# Altium PCB PCB1.PcbDoc (part 1 of 3)
Units mil, origin at the board's own origin, x right, y up, seen from the top; angles counter-clockwise.
Board outline 3937.01 x 3937.01 mil, 2 copper layers (Top Layer, Bottom Layer); 162 components, 129 nets, 526 pads, 166 vias.
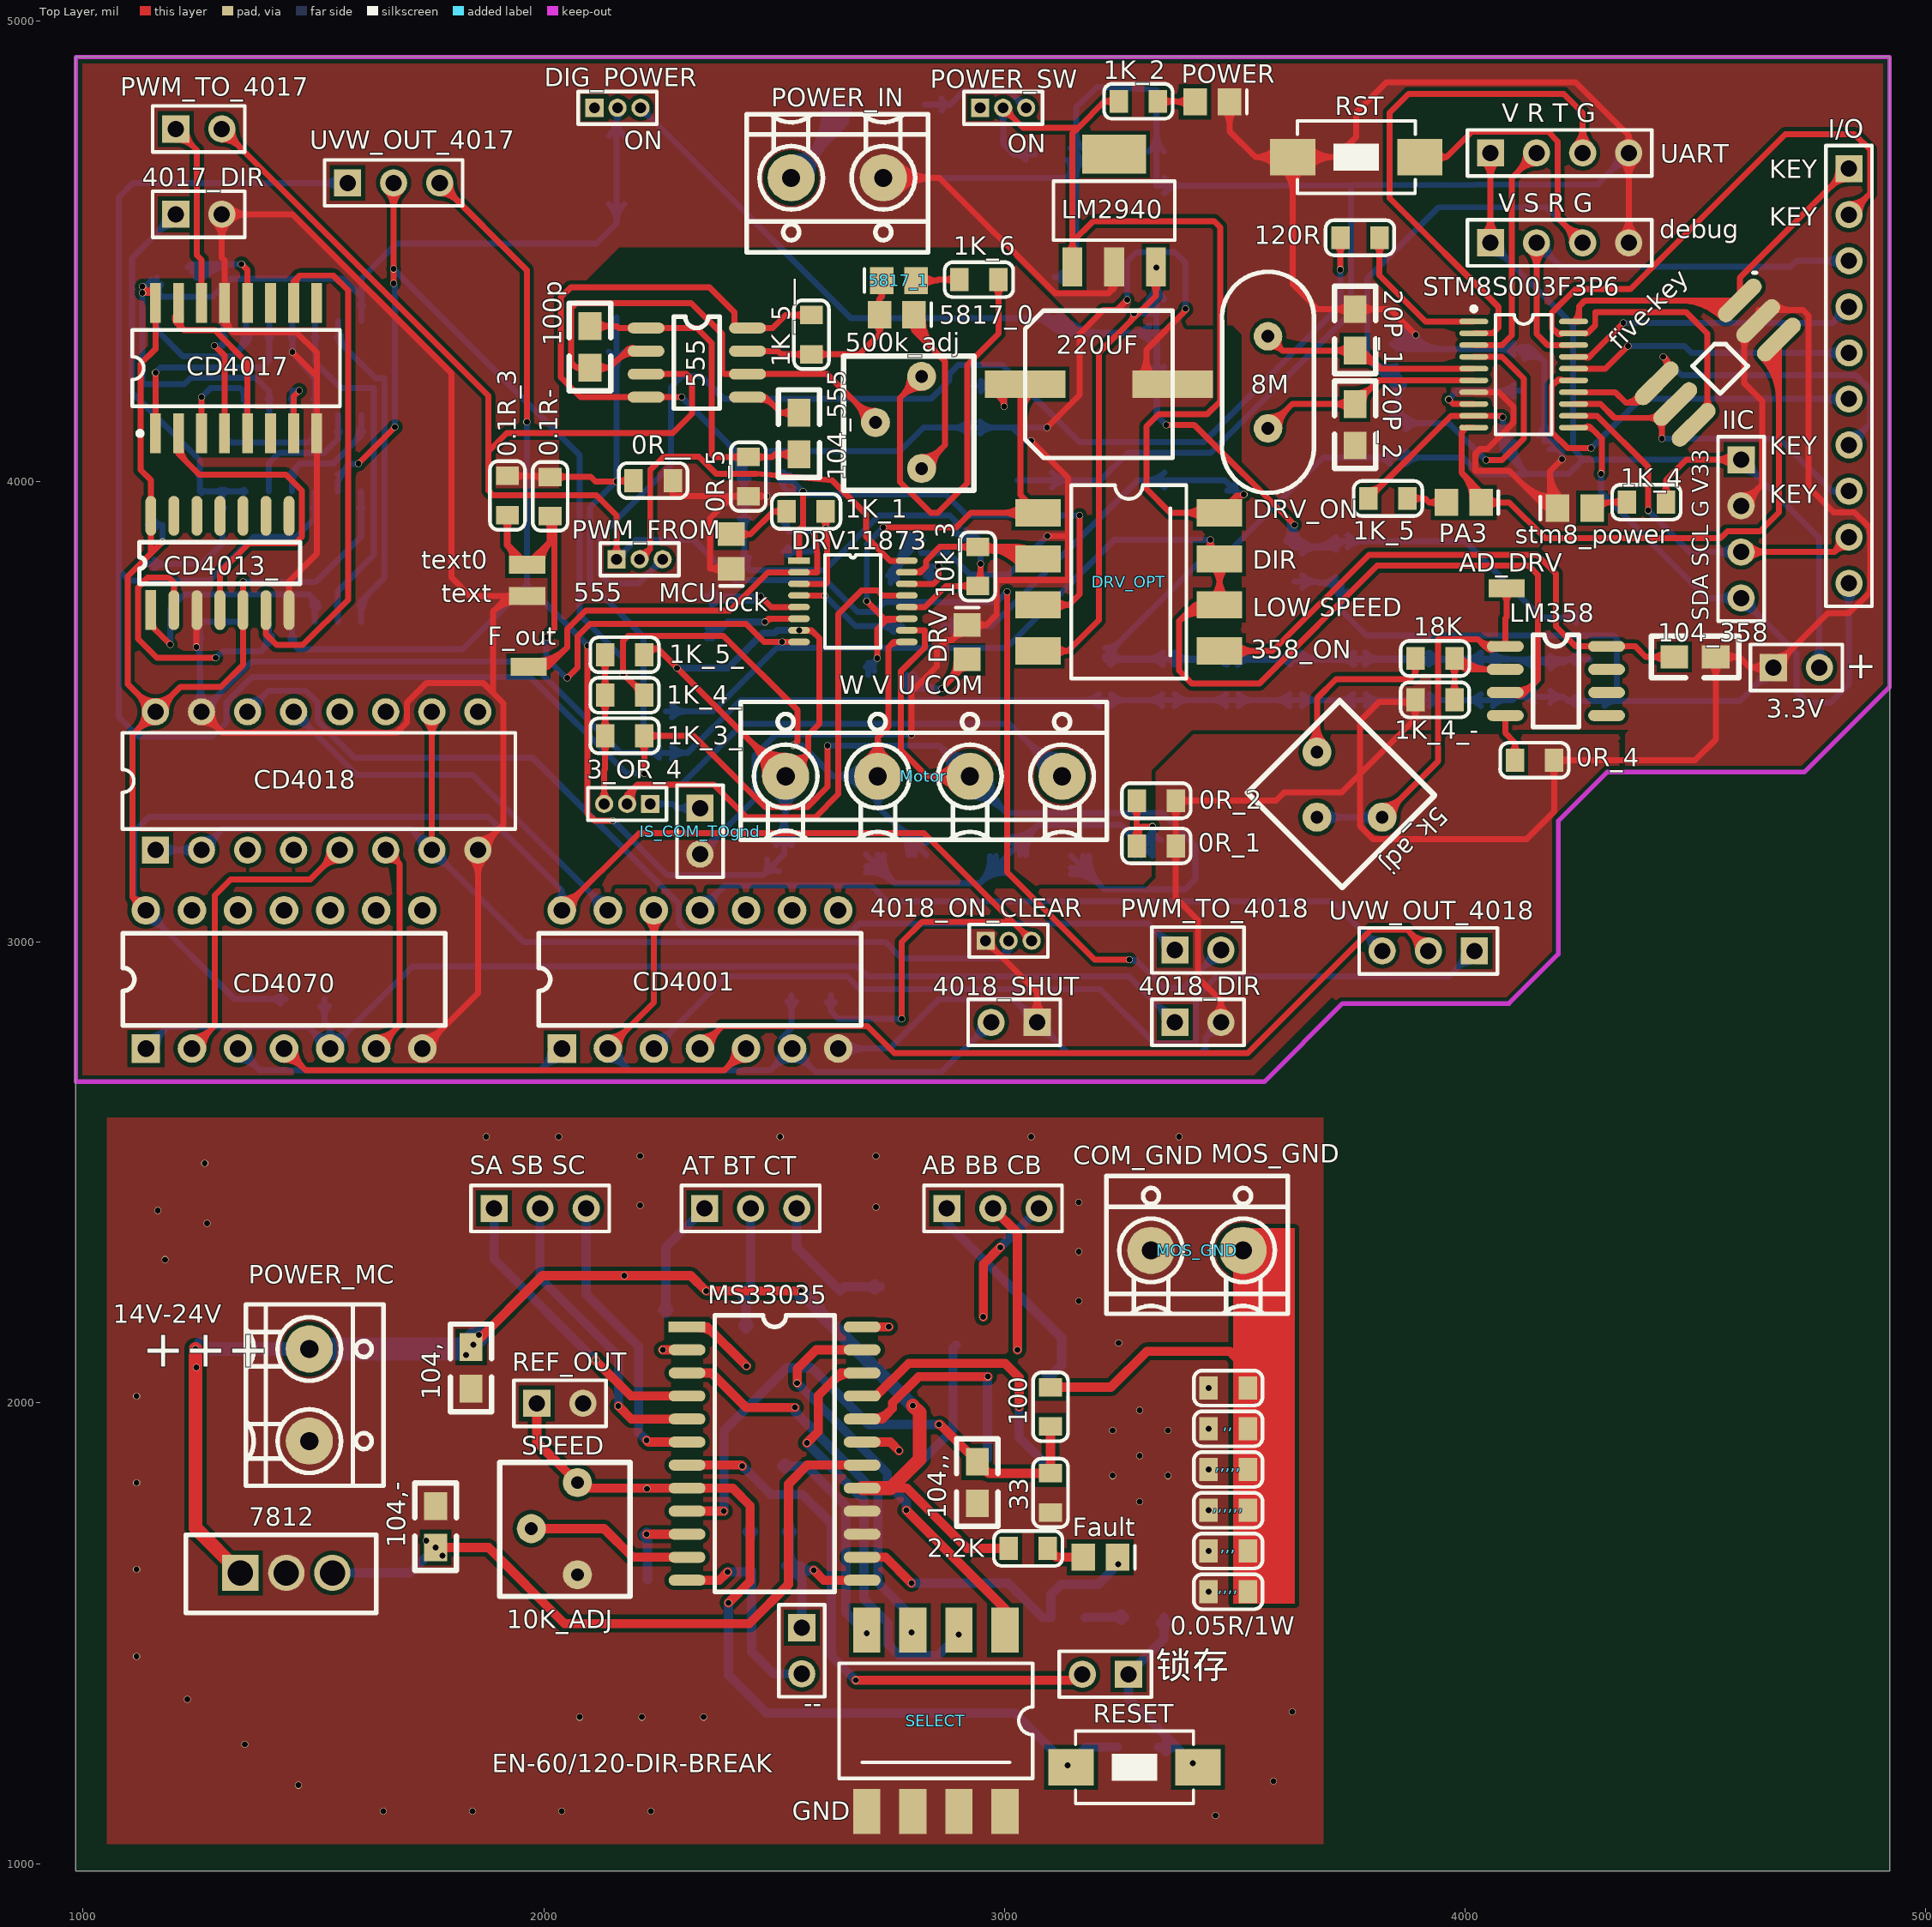
[diagram p0: Top Layer view]
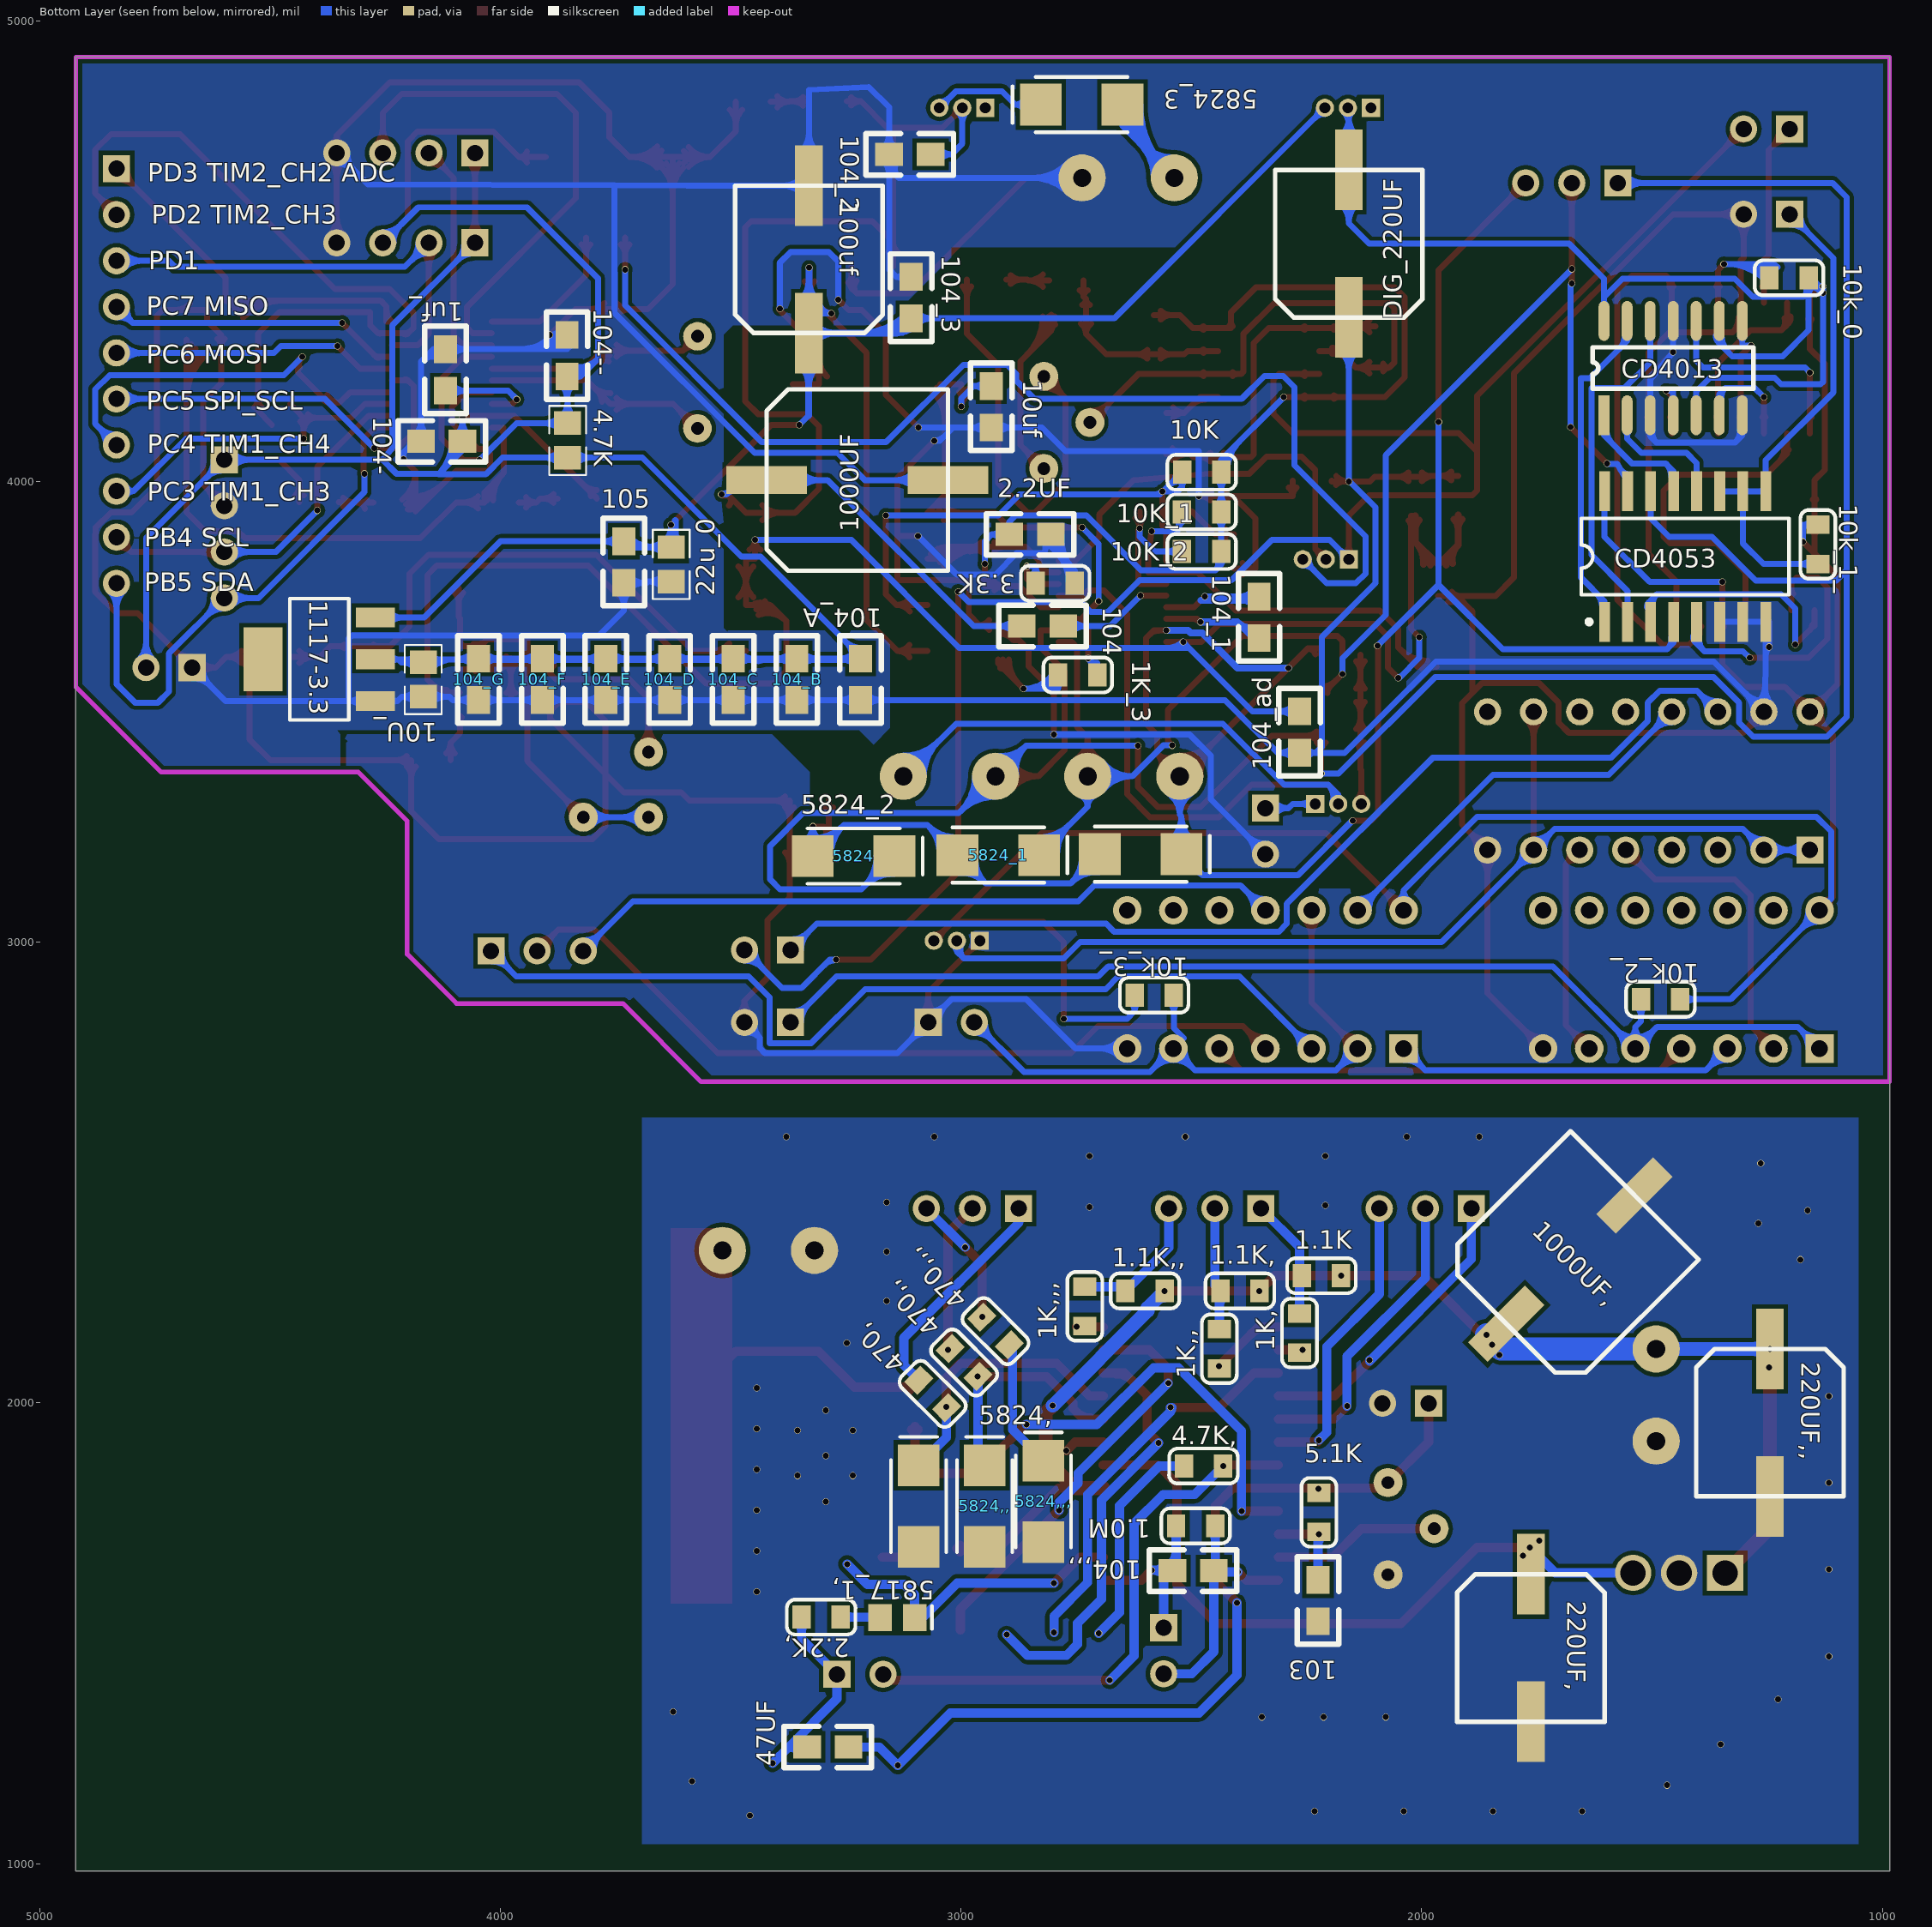
[diagram p1: Bottom Layer view, seen from below]
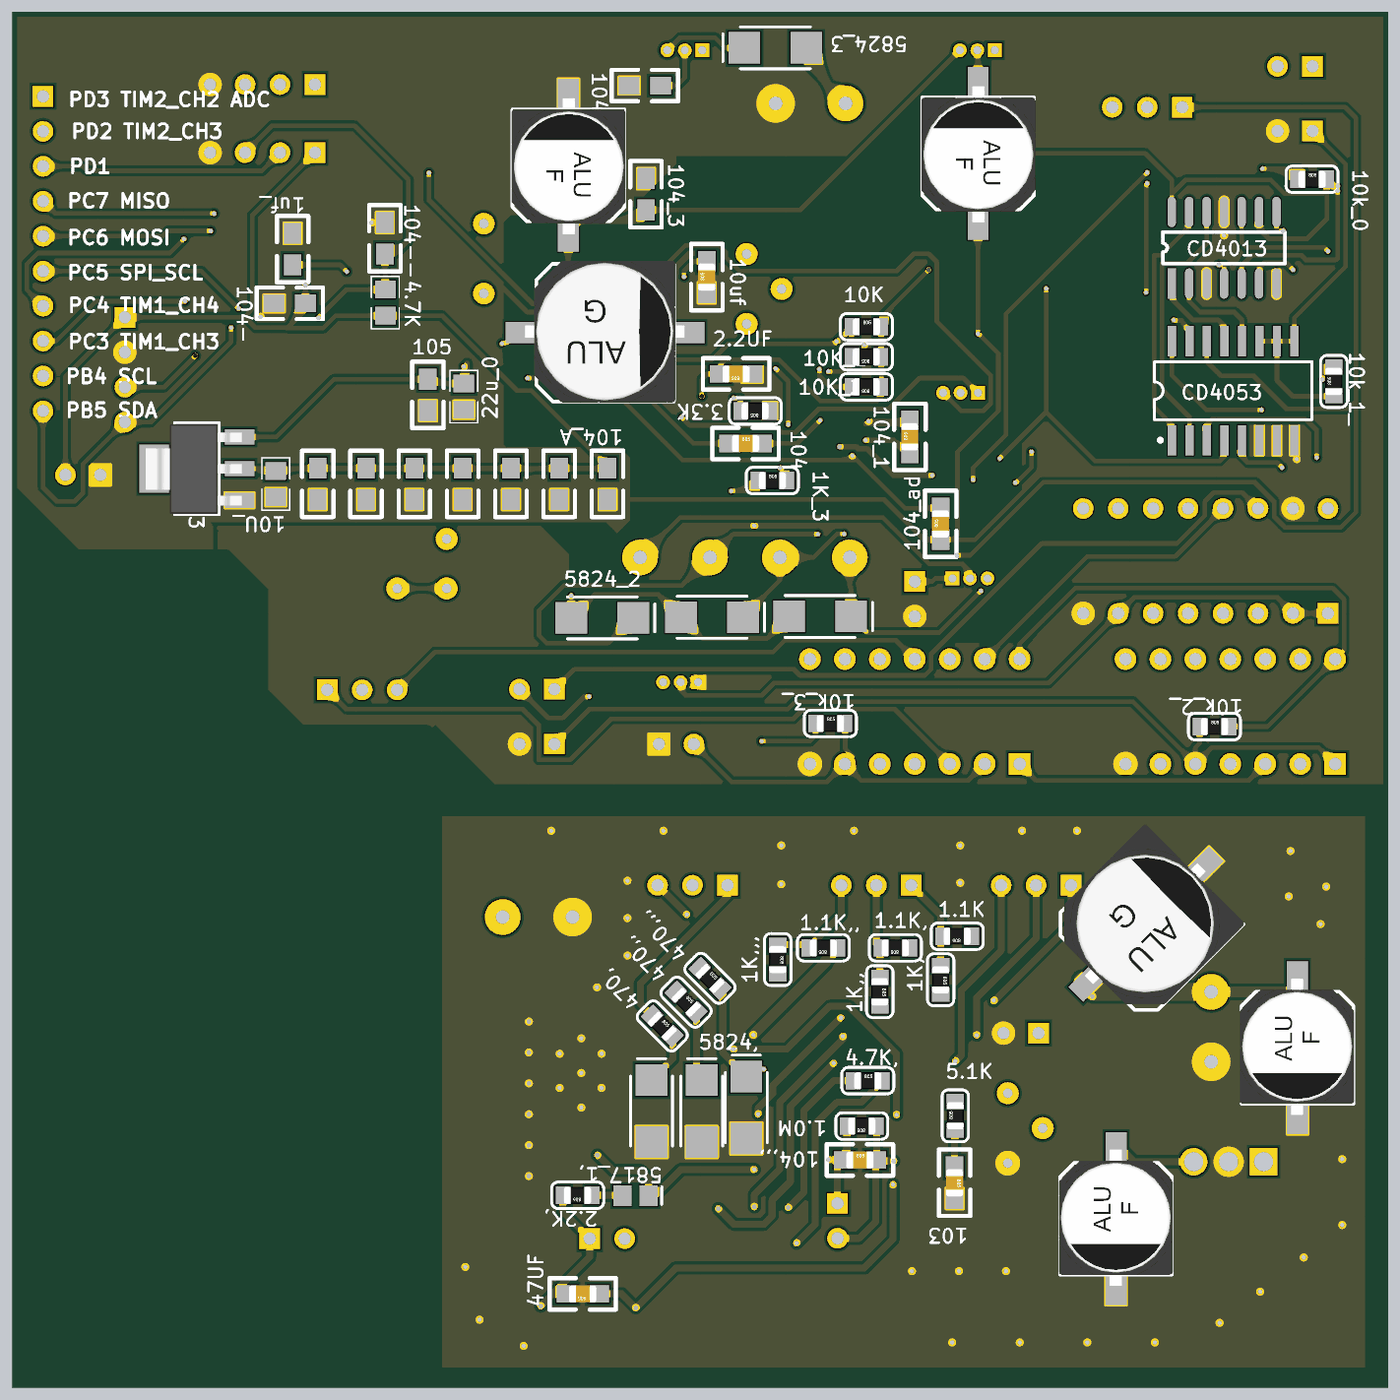
[diagram p4: 3D render of the assembled board from below, using the file's embedded part models]

## Layer stack, top to bottom
Top Layer: signal copper 1.4
Dielectric: dielectric 12.6, FR-4, Dk 4.8
Bottom Layer: signal copper 1.4

## Board outline
984.25,984.25 4921.26,984.25 4921.26,4921.26 984.25,4921.26

## Design rules (kind name [scope] priority, off if disabled: settings)
Clearance [All] p1: gap=9
ComponentClearance [All] p1 off: gap=10 collisioncheckmode=3 verticalgap=10 showdistances=FALSE
PlaneConnect [All] p1: planeconnectstyle=Direct reliefexpansion=20 reliefentries=4 reliefconductorwidth=10 reliefairgap=10
PolygonConnect [All] p1: connectstyle=Direct reliefconductorwidth=10 reliefentries=4 polygonreliefangle="90 Angle"
RoutingVias [All] p1: holewidth=13 width=15 viastyle="Through Hole" minholewidth=13 minwidth=15 maxholewidth=13 maxwidth=15
SilkscreenOverComponentPads [All] p1: minsilkscreentomaskgap=10
SolderMaskExpansion [All] p1: expansion=4
Width Width_1 [All] p1: maxlimit=50 minlimit=8 preferedwidth=13
25 further rules are at their usual default settings.

## Classes and differential pairs
component class Sheet1: 0.1R- 0.1R_3 0R_1 0R_2 0R_4 0R_5 0R__ 1K_1 1K_2 1K_3 1K_3_ 1K_4 1K_4_ 1K_4_- 1K_5 1K_5_ 1K_5__ 1K_6 1uf_ 2.2UF 3.3K 3.3V 3_OR_4 4.7K 5k_adj 8M 10K 10k_0 10K_1 10k_1_ 10K_2 10k_2_ 10k_3 10k_3_ 10U_ 10uf 18K 20P_1 20P_2 22u_0 30pf 100p 100uf 104 104- 104-- 104_1 104_2 104_3 104_358 104_555 104_A 104_ad 104_B 104_C 104_D 104_E 104_F 104_G 105 120R 220UF 500k_adj 555 1000UF 1117-3.3 4017_DIR 4018_DIR 4018_ON_CLEAR 4018_SHUT 5817_0 5817_1 5824 5824_1 5824_2 5824_3 AD_DRV CD4001 CD4013 CD4013_ CD4017 CD4018 CD4053 CD4070 change debug DIG_220UF DIG_POWER DRV DRV11873 DRV_OPT F_out five-key I/O IIC IS_COM_TOgnd LM358 LM2940 lock Motor PA3 POWER POWER_IN POWER_SW PWM_FROM PWM_TO_4017 PWM_TO_4018 RST stm8_power STM8S003F3P6 text text0 UART UVW_OUT_4017 UVW_OUT_4018

## Components (designator, comment, footprint, x,y, rotation, side; value= is the part's Value field where it differs from the comment)
0.1R- "Res2" "RES 0805_1" 2014,4010 r270 top
0.1R_3 "Res2" "RES 0805_1" 1921,4012 r270 top
0.05R/1W "Res2" "RES 0805_1" 3528,2032 r180 top
0R_1 "Res2" "RES 0805_1" 3372,3209 r180 top
0R_2 "Res2" "RES 0805_1" 3372,3307 r180 top
0R_4 "Res2" "RES 0805_1" 4108,3395 r0 top
0R_5 "Res2" "RES 0805_1" 2444,4053 r270 top
0R__ "Res2" "RES 0805_1" 2195,4002 r0 top
1.0M "Res2" "RES 0805_1" 2448,1733 r0 bottom
1.1K "Res2" "RES 0805_1" 2175,2276 r0 bottom
1.1K, "Res2" "RES 0805_1" 2352,2243 r0 bottom
1.1K,, "Res2" "RES 0805_1" 2558,2243 r0 bottom
1K, "Res2" "RES 0805_1" 2265,2194 r270 bottom
1K,, "Res2" "RES 0805_1" 2439,2160 r270 bottom
1K,,, "Res2" "RES 0805_1" 2731,2252 r270 bottom
1K_1 "Res2" "RES 0805_1" 2527,3935 r0 top
1K_2 "Res2" "RES 0805_1" 3333,4825 r180 top
1K_3 "Res2" "RES 0805_1" 2789,3580 r180 bottom
1K_3_ "Res2" "RES 0805_1" 2133,3448 r0 top
1K_4 "Res2" "RES 0805_1" 4351,3955 r0 top
1K_4_ "Res2" "RES 0805_1" 2133,3536 r0 top
1K_4_- "Res2" "RES 0805_1" 3976.9,3526 r180 top
1K_5 "Res2" "RES 0805_1" 3875,3963 r180 top
1K_5_ "Res2" "RES 0805_1" 2133,3624 r0 top
1K_5__ "Res2" "RES 0805_1" 2581,4276 r90 top
1K_6 "Res2" "RES 0805_1" 2902,4438 r0 top
1uf_ "1UF" 0805 4119,4197 r90 bottom
2.2K "Res2" "RES 0805_1" 3009,1684 r0 top
2.2K, "Res2" "RES 0805_1" 3261,1535 r0 bottom
2.2UF "Cap" 0805_C 2805,3885 r0 bottom
3.3K "Res2" "RES 0805_1" 2753,3779 r0 bottom
3.3V "PIN 2" HDR1X2 4669,3596 r0 top
3_OR_4 "MHDR1X3" MHDR1X3 2231,3300 r180 top
4.7K "4.7K" 0805-1 3854,4089 r270 bottom
4.7K, "Res2" "RES 0805_1" 2516,1863 r180 bottom
5.1K "Res2" "RES 0805_1" 2223,1720 r90 bottom
5k_adj "Header 3" pot（正方形） 3761,3436 r225 top
8M "8M" XTAL2 3572,4115 r270 top
10K "Res2" "RES 0805_1" 2519.9,4020 r180 bottom
10k_0 "Res2" "RES 0805_1" 1245,4442 r180 bottom
10K_1 "Res2" "RES 0805_1" 2435,3934 r0 bottom
10k_1_ "Res2" "RES 0805_1" 1140,3821 r90 bottom
10K_2 "Res2" "RES 0805_1" 2435,3848 r0 bottom
10k_2_ "Res2" "RES 0805_1" 1524,2876 r180 bottom
10k_3 "Res2" "RES 0805_1" 2942,3858 r270 top
10k_3_ "Res2" "RES 0805_1" 2623,2885 r180 bottom
10U_ "Cap Pol1" 0805-1 4167,3570 r270 bottom
10uf "Cap" 0805_C 2934,4117 r90 bottom
18K "Res2" "RES 0805_1" 3892,3616 r0 top
20P_1 "20P" 0805 3761,4374 r270 top
20P_2 "20P" 0805 3761,4078 r90 top
22u_0 "Cap Pol1" 0805-1 3629,3820 r270 bottom
33 "Res2" "RES 0805_1" 3100,1762.11 r90 top
47UF "Cap" 0805_C 3244,1253 r0 bottom
100 "Res2" "RES 0805_1" 3100,2034 r270 top
100p "Cap" 0805_C 2100,4337 r270 top
100uf "Cap Pol1" capso_8*10 3330,4482 r270 bottom
103 "Cap" 0805_C 2225,1616 r270 bottom
104 "Cap" 0805_C 2868,3686 r180 bottom
104, "Cap" 0805_C 1842,2031 r90 top
104,, "Cap" 0805_C 2941,1872 r270 top
104,,, "Cap" 0805_C 2541,1636 r180 bottom
104,- "Cap" 0805_C 1765,1776 r270 top
104- "104" 0805 4082,4087 r0 bottom
104-- "104" 0805 3855,4318 r270 bottom
104_1 "Cap" 0805_C 2353,3660 r90 bottom
104_2 "Cap" 0805 3156,4710 r180 bottom
104_3 "Cap" 0805 3108,4444 r270 bottom
104_358 "Cap" 0805_C 4544,3619 r180 top
104_555 "Cap" 0805_C 2554,4059 r90 top
104_A "104" 0805 3218,3615.53 r270 bottom
104_ad "Cap" 0805_C 2265,3411 r90 bottom
104_B "104" 0805 3356.17,3615.53 r270 bottom
104_C "104" 0805 3494.33,3615.53 r270 bottom
104_D "104" 0805 3632.5,3615.53 r270 bottom
104_E "104" 0805 3770.67,3615.53 r270 bottom
104_F "104" 0805 3908.83,3615.53 r270 bottom
104_G "104" 0805 4047,3615.53 r270 bottom
105 "105" 0805 3732,3870 r270 bottom
120R "Res2" "RES 0805_1" 3814,4529 r180 top
220UF "Cap Pol1" capso_8*10 3205,4211 r180 top
220UF, "Cap Pol1" capso_8*10 1763,1468 r90 bottom
220UF,, "Cap Pol1" capso_8*10 1244,1957 r90 bottom
470, "Res2" "RES 0805_1" 3091.41,2049.48 r225 bottom
470,, "Res2" "RES 0805_1" 3023.17,2117.71 r225 bottom
470,,, "Res2" "RES 0805_1" 2954.93,2185.95 r225 bottom
500k_adj "Header 3" pot（正方形） 2895,4186 r180 top
555 "Header 4X2A" SOP8 2337,4258 r0 top
1000UF "Cap Pol1" CAPSO_10*10 3225,4003 r0 bottom
1000UF, "Cap Pol1" CAPSO_10*10 1677,2311 r315 bottom
1117-3.3 "LM1117" SOT223 4390,3634 r90 bottom
4017_DIR "Header 2" HDR1X2 1201,4580 r0 top
4018_DIR "Header 2" HDR1X2 3370,2826 r0 top
4018_ON_CLEAR "MHDR1X3" MHDR1X3 2959,3003 r0 top
4018_SHUT "Header 2" HDR1X2 3071,2826 r180 top
5817_0 "1N5819" LED_0805 2766,4362 r0 top
5817_1 "1N5819" LED_0805 2771,4436 r180 top
5817_1, "1N5819" LED_0805 3138,1534 r180 bottom
5824 "1N5819" DIODE-SMA 3233,3187 r180 bottom
5824, "1N5819" DIODE-SMA 3092,1776 r90 bottom
5824,, "1N5819" DIODE-SMA 2948.5,1776 r90 bottom
5824,,, "1N5819" DIODE-SMA 2821,1786 r90 bottom
5824_1 "1N5819" DIODE-SMA 2919,3189 r180 bottom
5824_2 "1N5819" DIODE-SMA 2610,3191 r180 bottom
5824_3 "1N5819" DIODE-SMA 2738,4818 r0 bottom
7812 "L78XXCV" TO-220B 1341,1631 r0 top
,, "Res2" "RES 0805_1" 3528,1943.6 r180 top
,,, "Res2" "RES 0805_1" 3528,1678.4 r180 top
,,,, "Res2" "RES 0805_1" 3528,1590 r180 top
,,,,, "Res2" "RES 0805_1" 3528,1855.2 r180 top
,,,,,, "Res2" "RES 0805_1" 3528,1766.8 r180 top
-- "Header 2" HDR1X2 2560,1512 r270 top
"AB BB CB" "Header 3" HDR1X3 2875,2422 r0 top
AD_DRV "1PIN" P 4090,3768 r180 top
"AT BT CT" "Header 3" HDR1X3 2349,2422 r0 top
CD4001 "Header 7X2A" DIP14 2039,2769 r90 top
CD4013 "Header 7X2A" SOP-14P 1454,4246 r90 bottom
CD4013_ "Header 7X2A" SOP-14P 1297,3823 r90 top
CD4017 "Header 8X2A" sop16(2003) 1332,4246 r0 top
CD4018 "Header 8X2A" DIP16 1507,3350 r0 top
CD4053 "Header 8X2A" sop16(2003) 1428,3837 r180 bottom
CD4070 "Header 7X2A" DIP14 1136.17,2769 r90 top
debug "Header 4" HDR1X4 4055,4518 r0 top
DIG_220UF "Cap Pol1" capso_8*10 2158,4516 r270 bottom
DIG_POWER "MHDR1X3" MHDR1X3 2110,4811 r0 top
DRV "LED" LED_0805 2919,3651 r90 top
DRV11873 "Header 8X2A" TSSOP16 2554,3828 r0 top
DRV_OPT "SW DIP-4" SW8_4BIT 3270,3782 r270 top
F_out "1PIN" P 1967,3598 r180 top
Fault "LED" LED_0805 3208,1665 r0 top
five-key "five_key" 五向按键 4416,4213 r0 top
I/O "Header 10" HDR1X10 4833,4679 r270 top
IIC "Header 4" HDR1X4 4599,4047 r270 top
IS_COM_TOgnd "Header 2" HDR1X2 2339,3291 r270 top
LM358 "10358" SOP8 4202,3567 r0 top
LM2940 "LM2940_2" SOT223 3258,4585 r0 top
lock "LED" LED_0805 2407,3848 r270 top
MOS_GND "Header 2" ED120/2DS_1 3518,2331 r180 top
Motor "Header 4" ED120/4DS_1 3125,3360 r180 top
MS33035 "Header 12X2A" SO-24W 2312,2165 r0 top
PA3 "LED" LED_0805 3997,3954.53 r0 top
POWER "LED" LED_0805 3451,4824 r0 top
POWER_IN "Header 2" ED120/2DS_1 2537,4659 r0 top
POWER_MC "Header 2" ED120/2DS_1 1491,1917 r90 top
POWER_SW "MHDR1X3" MHDR1X3 2947,4811 r0 top
PWM_FROM "MHDR1X3" MHDR1X3 2158,3831 r0 top
PWM_TO_4017 "Header 2" HDR1X2 1201,4765 r0 top
PWM_TO_4018 "Header 2" HDR1X2 3370,2983 r0 top
REF_OUT "Header 2" HDR1X2 1985,1999 r0 top
RESET "SW-PB" SW_PB2_A1 3280,1209 r270 top
RST "SW-PB" SW_PB2_A1 3766,4704 r90 top
"SA SB SC" "Header 3" HDR1X3 1892,2422 r0 top
SELECT "SW DIP-4" SW8_4BIT 2851,1310 r180 top
SPEED "MHDR1X3" pot（正方形） 2148,1785 r180 top
stm8_power "LED" LED_0805 4238,3942 r180 top
STM8S003F3P6 "STM8S003F3P6" TSSOP20 4127,4232 r270 top
text "1PIN" P 1964,3751 r180 top
text0 "1PIN" P 1964,3819 r180 top
UART "PIN 4" HDR1X4 4055,4713 r0 top
UVW_OUT_4017 "Header 3" HDR1X3 1574,4648 r0 top
UVW_OUT_4018 "Header 3" HDR1X3 4020,2981 r180 top
锁存 "Header 2" HDR1X2 3269,1411 r180 top

## Footprints (in the part's own frame and the unit in brackets; to place one, negate y for a bottom-side part, rotate by r counter-clockwise, add the part's x,y. Pads: shape width x height; smd on the part's side, far side on the other; paste and mask are expansions set on the pad)
0805 [mil]
  rect 60x50 smd: 1(0,0) 2(90,0)
  silkscreen extent -50,-45 140,45
0805-1 [mm] "贴?"
  rect 1.3x1.5 smd: 1(-0.95,0) 2(0.95,0)
  silkscreen extent -1.91,-1.02 1.91,1.02, body extent -1.14,-0.51 1.14,0.51, height 1
0805_C [mil]
  rect 60x50 smd: 1(0,0) 2(90,0)
  silkscreen extent -50,-45 140,45, body extent 6,-25 84,25, height 31
capso_8*10 [mil]
  rect 175x60 smd: 1(160,0) 2(-160,0)
  silkscreen extent -160,-160 160,160, body extent -192,-162 198,164, height 402
CAPSO_10*10 [mil]
  rect 175x60 smd: 1(196.85,0) 2(-196.85,0)
  silkscreen extent -197,-197 197,197, body extent -227,-206 229,200, height 402
DIODE-SMA [mm] "贴?"
  rect 2.3x2.3 smd: 1(-2.25,0) 2(2.25,0)
  silkscreen extent -2.54,-1.52 3.81,1.52, body extent -2.92,-1.4 2.92,1.4, height 3
DIP14 [mil]
  rect 62x62 hole 36: 1(0,0)
  round 62 hole 36: 2(0,-100) 3(0,-200) 4(0,-300) 5(0,-400) 6(0,-500) 7(0,-600) 8(300,-600) 9(300,-500) 10(300,-400) 11(300,-300) 12(300,-200) 13(300,-100) 14(300,0)
  silkscreen extent 50,-650 250,50
DIP16 [mm]
  rect 1.5x1.5 hole 0.9: 1(-8.89,-3.81)
  round 1.5 hole 0.9: 2(-6.35,-3.81) 3(-3.81,-3.81) 4(-1.27,-3.81) 5(1.27,-3.81) 6(3.81,-3.81) 7(6.35,-3.81) 8(8.89,-3.81) 9(8.89,3.81) 10(6.35,3.81) 11(3.81,3.81) 12(1.27,3.81) 13(-1.27,3.81) 14(-3.81,3.81) 15(-6.35,3.81) 16(-8.89,3.81)
  silkscreen extent -10.72,-2.65 10.95,2.65
ED120/2DS_1 [mm]
  round 2.6 hole 1: 1(0,0) 2(5.08,0)
  silkscreen extent -2.46,-4.1 7.54,3.5
ED120/4DS_1 [mm]
  round 2.6 hole 1: 1(0,0) 2(5.08,0) 3(10.16,0) 4(15.24,0)
  silkscreen extent -2.46,-4.1 17.72,3.5
HDR1X2 [mm] "Connector; Header; 2 Position"
  rect 1.5x1.5 hole 0.9: 1(0,0)
  round 1.5 hole 0.9: 2(2.54,0)
  silkscreen extent -1.27,-1.27 3.81,1.27
HDR1X3 [mm] "Connector; Header; 3 Position"
  rect 1.5x1.5 hole 0.9: 1(0,0)
  round 1.5 hole 0.9: 2(2.54,0) 3(5.08,0)
  silkscreen extent -1.27,-1.27 6.35,1.27
HDR1X4 [mm] "Connector; Header; 4 Position"
  rect 1.5x1.5 hole 0.9: 1(0,0)
  round 1.5 hole 0.9: 2(2.54,0) 3(5.08,0) 4(7.62,0)
  silkscreen extent -1.27,-1.27 8.89,1.27
HDR1X10 [mm] "Connector; Header; 10 Position"
  rect 1.5x1.5 hole 0.9: 1(0,0)
  round 1.5 hole 0.9: 2(2.54,0) 3(5.08,0) 4(7.62,0) 5(10.16,0) 6(12.7,0) 7(15.24,0) 8(17.78,0) 9(20.32,0) 10(22.86,0)
  silkscreen extent -1.27,-1.27 24.13,1.27
LED_0805 [mm] "贴?"
  rect 1.3x1.5 smd: 1(-0.95,0) 2(0.95,0)
  silkscreen extent 1.91,-0.64 1.91,0.64
MHDR1X3 [mm] "Connector; Header; 3 Position"
  rect 1x1 hole 0.6: 1(0,0)
  round 1 hole 0.6: 2(1.27,0) 3(2.54,0)
  silkscreen extent -0.9,-0.9 3.44,0.9
P [mm]
  rect 2x1 smd: 1(0,0)
pot（正方形） [mm]
  round 1.6 hole 0.7: 1(1.905,-1.067) 2(4.445,1.473) 3(1.905,4.013)
  silkscreen extent -0.99,-2.18 6.2,5.21
"RES 0805_1" [mil]
  rect 40x50 smd: 1(0,0) 2(85,0)
  silkscreen extent -32,-38 117,38, body extent 3,-25 82,25, height 30
SO-24W [mil]
  rect 80x24 smd: 1(-1,0)
  oval 80x24 smd: 2(-1,-50) 3(-1,-100) 4(-1,-150) 5(-1,-200) 6(-1,-250) 7(-1,-300) 8(-1,-350) 9(-1,-400) 10(-1,-450) 11(-1,-500) 12(-1,-550) 13(379,-550) 14(379,-500) 15(379,-450) 16(379,-400) 17(379,-350) 18(379,-300) 19(379,-250) 20(379,-200) 21(379,-150) 22(379,-100) 23(379,-50) 24(379,0)
  silkscreen extent 59,-575 319,25
SOP8 [mil]
  oval 80x24 smd: 1(-115,75) 2(-115,25) 3(-115,-25) 4(-115,-75) 5(105,-75) 6(105,-25) 7(105,25) 8(105,75)
  silkscreen extent -55,-100 45,100, body extent -126,-95 110,97, height 67
sop16(2003) [mm] "Small Outline; 16 Leads; Body Width 5.6 mm; Pit"
  rect 0.6x2.2 smd: 1(-4.445,-3.6) 2(-3.175,-3.6) 3(-1.905,-3.6) 4(-0.635,-3.6) 5(0.635,-3.6) 6(1.905,-3.6) 7(3.175,-3.6) 8(4.445,-3.6) 9(4.445,3.6) 10(3.175,3.6) 11(1.905,3.6) 12(0.635,3.6) 13(-0.635,3.6) 14(-1.905,3.6) 15(-3.175,3.6) 16(-4.445,3.6)
  silkscreen extent -5.73,-3.72 5.73,2.1
SOP-14P [mm]
  rect 2.2x0.6 smd: 1(-2.6,3.81)
  oval 2.2x0.6 smd: 2(-2.6,2.54) 3(-2.6,1.27) 4(-2.6,0) 5(-2.6,-1.27) 6(-2.6,-2.54) 7(-2.6,-3.81) 8(2.6,-3.81) 9(2.6,-2.54) 10(2.6,-1.27) 11(2.6,0) 12(2.6,1.27) 13(2.6,2.54) 14(2.6,3.81)
  silkscreen extent -1.14,-4.42 1.14,4.44
SOT223 [mm]
  rect 1.1x2.15 smd: 1(-2.808,-3.025) 2(-0.508,-3.025) 3(1.792,-3.025)
  rect 3.5x2.15 smd: 4(-0.508,3.175)
  silkscreen extent -3.86,-1.55 2.84,1.7, body extent -3.78,-3.2 2.72,3.8, height 1.65
SW8_4BIT [mm]
  rect 1.5x2.5 smd: 1(-3.81,-5) 2(-1.27,-5) 3(1.27,-5) 4(3.81,-5) 5(3.81,5) 6(1.27,5) 7(-1.27,5) 8(-3.81,5)
  silkscreen extent -5.33,-3.18 5.33,3.18, body extent -5.21,-3.43 5.08,3.43, height 2.15
SW_PB2_A1 [mm]
  rect 2x2.5 smd: 1(0,3.556) 2(0,-3.444)
  silkscreen extent -2,-3.19 2,3.31, body extent -2.03,-3.17 2.03,3.3, height 1.2
TO-220B [mm]
  rect 2x2 hole 1.4: 1(0,0)
  round 2 hole 1.4: 2(2.54,0) 3(5.08,0)
  silkscreen extent -3,-2.2 7.5,2.1
TSSOP16 [mm]
  rect 1.2x0.36 smd: 1(0,0)
  oval 1.2x0.36 smd: 2(0,-0.64) 3(0,-1.28) 4(0,-1.92) 5(0,-2.56) 6(0,-3.2) 7(0,-3.84) 8(0,-4.48) 9(5.94,-4.48) 10(5.94,-3.84) 11(5.94,-3.2) 12(5.94,-2.56) 13(5.94,-1.92) 14(5.94,-1.28) 15(5.94,-0.64) 16(5.94,0)
  silkscreen extent 1.43,-4.8 4.5,0.32
TSSOP20 [mm] "Shrink Small Outline; 20 Leads; Body Width 4.4 mm; Pitch 0.65 mm"
  oval 0.3x1.6 smd: 1(-2.925,-2.75) 2(-2.275,-2.75) 3(-1.625,-2.75) 4(-0.975,-2.75) 5(-0.325,-2.75) 6(0.325,-2.75) 7(0.975,-2.75) 8(1.625,-2.75) 9(2.275,-2.75) 10(2.925,-2.75) 11(2.925,2.75) 12(2.275,2.75) 13(1.625,2.75) 14(0.975,2.75) 15(0.325,2.75) 16(-0.325,2.75) 17(-0.975,2.75) 18(-1.625,2.75) 19(-2.275,2.75) 20(-2.925,2.75)
  silkscreen extent -3.75,-2.87 3.3,1.55, body extent -3.3,-1.91 3.3,1.91, height 1.1
XTAL2 [mil]
  round 62 hole 28: 1(0,0) 2(-200,0)
  silkscreen extent -340,-100 140,100
五向按键 [mil]
  oval 35.43x120 smd rot 135: 1(0,0) 2(40,-45) 3(80,-90) 4(180,180) 5(220,135) 6(265,95)
  silkscreen extent 78,-22 215,240

## Part data
1uf_ 20P_1 20P_2 104- 104--: library part "CAP 2"
2.2UF 10uf 47UF 100p 103 104 104, 104,, 104,,, 104,- 104_1 104_358 104_555 104_ad: "C"
3_OR_4 4018_ON_CLEAR "AB BB CB" "AT BT CT" DIG_POWER POWER_SW PWM_FROM "SA SB SC" UVW_OUT_4017 UVW_OUT_4018: "Header, 3-Pin"
4.7K: library part R
8M: library part XTAL
10U_ 22u_0 100uf 220UF 220UF, 220UF,, 1000UF 1000UF, DIG_220UF: "Polarized Capacitor (Radial)"
104_2 104_3: "Capacitor"
104_A 104_B 104_C 104_D 104_E 104_F 104_G 105: library part Cap, "Capacitor"
555: "Header, 4-Pin, Dual row"
1117-3.3: library part Component_1
4017_DIR 4018_DIR 4018_SHUT -- IS_COM_TOgnd PWM_TO_4017 PWM_TO_4018 REF_OUT 锁存: "Header, 2-Pin"
5817_0 5817_1 5817_1, 5824 5824, 5824,, 5824,,, 5824_1 5824_2 5824_3: library part "Diode 1N4001", "1 Amp General Purpose Rectifier"
7812: "ST POSITIVE VOLTAGE REGU"
CD4001 CD4070: "Header, 7-Pin, Dual row"
CD4013 CD4013_: "Header, 7-Pin, Dual"
CD4017 CD4018 CD4053 DRV11873: "Header, 8-Pin, Dual row"
debug IIC: "Header, 4-Pin"
DRV_OPT SELECT: "编码"
Fault: library part L
five-key: library part fi
I/O: "Header, 10-Pin"
LM358: library part 1
LM2940: library part LM
MOS_GND Motor POWER_IN POWER_MC: "Header,"
MS33035: "Header, 12-Pin, Dual row"
RESET RST: "微动"

## Via types
v1: diameter 15, hole 13, Top Layer to Bottom Layer, 166 vias

## Nets (pads, with @x,y where several pads share a name; then routed paths per layer and width w, separated by ;. In a path a pad name is that pad's centre, name@x,y a point inside that pad or via, vN(x,y) a via of type N, cw(c..) or ccw(c..) an arc to the next point about the centre after c; other vN are vias at no path point)
00: CD4013.6 CD4017.3 | length 305.1
  Top Layer w13: CD4017.3@1253.24,4139.52 ccw(c1244.18,4148.59) 1257,4148.59 ccw(c1269.82,4148.59) CD4017.3@1260.76,4139.52 ; CD4017.3@1257,4104.27 v1(1257,4183)
  Bottom Layer w13: v1(1257,4183) 1277,4203 1341,4203 ; CD4013.6@1348.81,4176.28 ccw(c1320.51,4182.5) 1341,4203 ; CD4013.6@1350.24,4178.89 ccw(c1341.18,4187.96) 1354,4187.96 ccw(c1366.82,4187.96) CD4013.6@1357.76,4178.89 ; CD4013.6@1354,4143.64 1354,4190 1341,4203
11: CD4013_.4 CD4017.2 | length 812.1
  Top Layer w13: CD4017.2@1203.26,4069.01 cw(c1194.3,4060) 1207,4060 ; CD4017.2@1207,4104.27 1207,4060 ; CD4017.2@1210.74,4069.01 ccw(c1219.7,4060) 1207,4060 ; CD4017.2@1212.31,4072.77 ccw(c1255.97,4072.77) 1225.1,4041.9 ; CD4013_.4@1293.24,3755.89 ccw(c1284.18,3764.96) 1297,3764.96 ccw(c1309.82,3764.96) CD4013_.4@1300.76,3755.89 ; CD4013_.4@1297,3720.64 1297,3803 1360,3866 1461,3866 1475,3880 1475,3980 1440,4015 1252,4015 1207,4060
22: CD4013.8 CD4017.4 | length 312.5
  Top Layer w13: v1(1285,4295) 1307,4273 CD4017.4@1307,4104.27 ; CD4017.4@1303.24,4139.52 ccw(c1294.18,4148.59) 1307,4148.59 ccw(c1319.82,4148.59) CD4017.4@1310.76,4139.52
  Bottom Layer w13: v1(1285,4295) 1304,4295 CD4013.8@1304,4348.36 ; CD4013.8@1300.24,4313.11 cw(c1291.18,4304.04) 1304,4304.04 cw(c1316.82,4304.04) CD4013.8@1307.76,4313.11
33: CD4013.4 CD4017.7 | length 206.3
  Top Layer w13: CD4017.7@1453.24,4139.52 ccw(c1444.18,4148.59) 1457,4148.59 ccw(c1469.82,4148.59) CD4017.7@1460.76,4139.52 ; CD4017.7@1457,4104.27 1457,4185 v1(1469,4197)
  Bottom Layer w13: CD4013.4@1450.24,4178.89 ccw(c1441.18,4187.96) 1454,4187.96 ccw(c1466.82,4187.96) CD4013.4@1457.76,4178.89 ; CD4013.4@1454,4143.64 1454,4197 v1(1469,4197)
44: CD4013_.6 CD4017.10 | length 1204.9
  Top Layer w13: CD4013_.6@1393.24,3685.39 cw(c1384.18,3676.32) 1397,3676.32 cw(c1409.82,3676.32) CD4013_.6@1400.76,3685.39 ; CD4013_.6@1397,3720.64 1397,3668 1420,3645 1477,3645 1575,3743 1575,4415 1543,4447 1470,4447 ; CD4017.10@1453.24,4422.98 ccw(c1444.18,4432.05) 1457,4432.05 ccw(c1469.82,4432.05) CD4017.10@1460.76,4422.98 ; CD4017.10@1457,4387.73 1457,4434 1470,4447 ; CD4017.10@1462.19,4420.36 cw(c1490.46,4426.53) 1470,4447
55: CD4013.10 CD4017.1 | length 516.2
  Top Layer w13: CD4017.1@1153.24,4139.52 ccw(c1144.18,4148.59) 1157,4148.59 ccw(c1169.82,4148.59) CD4017.1@1160.76,4139.52 ; CD4017.1@1157,4104.27 v1(1157,4236.07)
  Bottom Layer w13: v1(1157,4236.07) 1167.93,4247 1389,4247 1404,4262 CD4013.10@1404,4348.36 ; CD4013.10@1400.24,4313.11 cw(c1391.18,4304.04) 1404,4304.04 cw(c1416.82,4304.04) CD4013.10@1407.76,4313.11
60/120: MS33035.22 SELECT.2 | length 959.1
  Top Layer w20: v1(2571,1913) 2596,1938 2596,2016 2645,2065 MS33035.22@2691,2065 ; 2628.86,2048.86 cw(c2663,2014.72) MS33035.22@2663,2063
  Bottom Layer w20: v1(2571,1913) 2695,1789 2695,1574 2747,1522 2747,1476 2771,1452 2856,1452 v1(2901,1497)
66: CD4017.5 CD4017.15 | length 470.1
  Top Layer w13: CD4017.15@1199.61,4358.37 ccw(c1214.05,4354.2) 1203.42,4343.58 ; CD4017.15@1203.24,4352.48 cw(c1194.18,4343.41) 1207,4343.41 cw(c1219.82,4343.41) CD4017.15@1210.76,4352.48 ; CD4017.15@1207,4387.73 1207,4340 1219,4328 ; CD4017.15@1212.1,4354.76 ccw(c1238.22,4347.22) 1219,4328 ; CD4017.5@1353.24,4139.52 ccw(c1344.18,4148.59) 1357,4148.59 ccw(c1369.82,4148.59) CD4017.5@1360.76,4139.52 ; CD4017.5@1357,4104.27 1357,4257 1286,4328 1219,4328
77: CD4017.6
88: CD4017.9
99: CD4017.11
358_VCC: 104_358.2 DRV_OPT.5 LM358.8 | length 1432.2
  Top Layer w13: DRV_OPT.5@3466.85,3632 3582,3632 3791,3841 4156,3841 4197,3800 4197,3685 4240,3642 LM358.8@4307,3642 4369,3642 4392,3619 104_358.2@4454,3619 ; DRV_OPT.5@3502.82,3615.72 cw(c3542.13,3576.41) 3542.13,3632 cw(c3542.13,3687.59) DRV_OPT.5@3502.82,3648.28 ; LM358.8@4275.11,3638.11 ccw(c4265.72,3628.72) 4265.72,3642 ccw(c4265.72,3655.28) LM358.8@4275.11,3645.89 ; LM358.8@4338.89,3638.11 cw(c4348.28,3628.72) 4348.28,3642 cw(c4348.28,3655.28) LM358.8@4338.89,3645.89 ; 104_358.2@4435.92,3605.92 ccw(c4404.34,3574.34) 4404.34,3619 ccw(c4404.34,3663.66) 104_358.2@4435.92,3632.08
555_OUT: 555.3 PWM_FROM.1 PWM_TO_4017.2 PWM_TO_4018.2 | length 4558.3
  Top Layer w13: PWM_TO_4017.2@1301,4741.97 cw(c1301,4686.38) 1340.31,4725.69 cw(c1379.62,4765) PWM_TO_4017.2@1324.03,4765 ; PWM_TO_4017.2@1301,4765 1880,4186 1880,4065 ; PWM_FROM.1@2148.68,3840.32 ccw(c2126.17,3862.83) 2158,3862.83 ccw(c2189.83,3862.83) PWM_FROM.1@2167.32,3840.32 ; PWM_FROM.1@2158,3831 2158,3926 2114,3970 1890,3970 1880,3980 1880,4065 ; 555.3@2222,4233 2310,4233 2322,4221 2322,4147 2280,4105 1920,4105 1880,4065 ; 555.3@2253.89,4229.11 cw(c2263.28,4219.72) 2263.28,4233 cw(c2263.28,4246.28) 555.3@2253.89,4236.89 ; v1(3006,3761) 3006,3152 3196,2962 v1(3271,2962)
  Bottom Layer w13: PWM_FROM.1@2158,3831 2200,3873 2325,3873 2412.5,3785.5 2612.5,3785.5 2681,3717 2718.5,3717 2739.5,3738 2983,3738 v1(3006,3761) ; PWM_FROM.1@2158,3844.18 ccw(c2158,3876.02) 2180.51,3853.51 ccw(c2203.02,3831) PWM_FROM.1@2171.18,3831 ; v1@3271,2961 cw(c3271,2924.79) 3296.61,2950.39 ; v1(3271,2962) 3285,2962 3346,2901 3388,2901 PWM_TO_4018.2@3470,2983 ; PWM_TO_4018.2@3446.97,2983 cw(c3391.38,2983) 3430.69,2943.69 cw(c3470,2904.38) PWM_TO_4018.2@3470,2959.97
+3V3: 1K_4.2 1K_5.2 3.3V.2 4.7K.2 10U_.1 104-.1 104_A.1 104_B.1 104_C.1 104_D.1 104_E.1 104_F.1 104_G.1 1117-3.3.2 debug.1 IIC.1 STM8S003F3P6.9 UART.1 | length 8808.1
  Top Layer w13: 1K_5.2@3790,3963 3969.43,4142.43 STM8S003F3P6.9@4018.73,4142.43 4078.57,4142.43 v1(4082,4139) ; 1K_5.2@3790,3981.5 ccw(c3790,4026.16) 3821.58,3994.58 ; 1K_5.2@3803.5,3968 cw(c3824.02,3968) 1K_5.2@3809.51,3982.51 ; debug.1@4038.72,4534.28 ccw(c3999.41,4573.59) 4055,4573.59 ccw(c4110.59,4573.59) debug.1@4071.28,4534.28 ; UART.1@4038.72,4696.72 cw(c3999.41,4657.41) 4055,4657.41 cw(c4110.59,4657.41) UART.1@4071.28,4696.72 ; debug.1@4055,4518 UART.1@4055,4713 ; 4071.3,4142.43 cw(c4071.3,4128.3) v1@4081.29,4138.29 ; 1K_4.2@4426.45,3969.55 ccw(c4403.41,3992.59) 4436,3992.59 ccw(c4468.59,3992.59) 1K_4.2@4445.55,3969.55 ; 1K_4.2@4436,3955 4436,4003 4480,4047 IIC.1@4599,4047 ; IIC.1@4582.72,4030.72 ccw(c4543.41,3991.41) 4543.41,4047 ccw(c4543.41,4102.59) IIC.1@4582.72,4063.28
  Bottom Layer w13: 104_A.1@3218,3639.03 ccw(c3218,3684.97) 3250.48,3652.48 ; 104_A.1@3231.08,3602.45 cw(c3262.66,3570.86) 3262.66,3615.53 cw(c3262.66,3660.19) 104_A.1@3231.08,3628.61 ; 104_A.1@3236.5,3620.53 cw(c3279.89,3620.53) 3249.21,3651.21 ; 104_B.1@3343.08,3602.45 ccw(c3311.5,3570.86) 3311.5,3615.53 ccw(c3311.5,3660.19) 104_B.1@3343.08,3628.61 ; 104_B.1@3369.25,3602.45 cw(c3400.83,3570.86) 3400.83,3615.53 cw(c3400.83,3660.19) 104_B.1@3369.25,3628.61 ; 104_C.1@3476.95,3604.19 ccw(c3465.06,3599.85) 3463.79,3612.45 ccw(c3461.58,3634.32) 104_C.1@3479.37,3621.4 ; 104_C.1@3507.42,3602.45 cw(c3539,3570.86) 3539,3615.53 cw(c3539,3660.19) 104_C.1@3507.42,3628.61 ; 104_D.1@3619.42,3602.45 ccw(c3587.84,3570.86) 3587.84,3615.53 ccw(c3587.84,3660.19) 104_D.1@3619.42,3628.61 ; 104_D.1@3645.58,3602.45 cw(c3677.16,3570.86) 3677.16,3615.53 cw(c3677.16,3660.19) 104_D.1@3645.58,3628.61 ; 104_E.1@3757.58,3602.45 ccw(c3726,3570.86) 3726,3615.53 ccw(c3726,3660.19) 104_E.1@3757.58,3628.61 ; 104_E.1@3783.75,3602.45 cw(c3815.33,3570.86) 3815.33,3615.53 cw(c3815.33,3660.19) 104_E.1@3783.75,3628.61 ; 4.7K.2@3836.56,4038.1 ccw(c3803.97,4005.51) 3803.97,4051.6 ccw(c3803.97,4097.69) 4.7K.2@3836.56,4065.1 ; 4.7K.2@3871.44,4038.1 cw(c3904.03,4005.51) 3904.03,4051.6 cw(c3904.03,4097.69) 4.7K.2@3871.44,4065.1 ; 104_F.1@3895.75,3602.45 ccw(c3864.17,3570.86) 3864.17,3615.53 ccw(c3864.17,3660.19) 104_F.1@3895.75,3628.61 ; 104_F.1@3921.92,3602.45 cw(c3953.5,3570.86) 3953.5,3615.53 cw(c3953.5,3660.19) 104_F.1@3921.92,3628.61 ; 104_G.1@4033.92,3602.45 ccw(c4002.34,3570.86) 4002.34,3615.53 ccw(c4002.34,3660.19) 104_G.1@4033.92,3628.61 ; debug.1@4055,4494.97 cw(c4055,4439.38) 4094.31,4478.69 cw(c4133.62,4518) debug.1@4078.03,4518 ; debug.1@4055,4518 4234,4339 4234,4073 4255.51,4047 ; 104_G.1@4059.65,3602.03 cw(c4090.19,3569.44) 4091.64,3614.08 cw(c4093.09,3658.72) 104_G.1@4060.5,3628.18 ; 104-.1@4068.92,4100.08 ccw(c4037.34,4131.66) 4082,4131.66 ccw(c4126.66,4131.66) 104-.1@4095.08,4100.08 ; 104-.1@4079.5,4087.14 ccw(c4117.93,4086.43) 4090.75,4059.25 ; v1(4082,4139) 104-.1@4082,4087 4082,4068 4134,4016 ; 104-.1@4092.5,4086.9 ccw(c4160.39,4085.64) 4112.37,4037.63 ; 4101.05,3614 cw(c4101.05,3545.38) 10U_.1@4149.56,3593.9 ; 104-.1@4105.5,4086.66 ccw(c4202.84,4084.85) 4134,4016 ; 4132.43,3614 cw(c4132.43,3576.77) 10U_.1@4158.76,3603.1 ; 4132.9,3614 ccw(c4132.9,3637.56) 10U_.1@4149.56,3620.9 ; 4133,4017 4225.51,4017 4255.51,4047 ; 10U_.1@4167,3607.4 4215,3607.4 ; 10U_.1@4175.85,3603.8 cw(c4195.96,3589.07) 10U_.1@4195.96,3614 ; 10U_.1@4184.44,3620.9 ccw(c4201.1,3637.56) 4201.1,3614 ; 10U_.1@4184.87,3594.35 cw(c4215,3566.1) 4215,3607.4 ; 10U_.1@4184.87,3620.46 ccw(c4215,3648.7) 4215,3607.4 ; 10U_.1@4186.34,3596.12 cw(c4221.6,3570.3) 4221.6,3614 ; 1117-3.3.2@4237.71,3605.48 ccw(c4221.6,3594.52) 4221.6,3614 ; 1117-3.3.2@4237.71,3622.52 cw(c4221.6,3633.48) 4221.6,3614 ; 1117-3.3.2@4270.91,3614 4221.6,3614 ; IIC.1@4582.72,4030.72 ccw(c4543.41,3991.41) 4543.41,4047 ccw(c4543.41,4102.59) IIC.1@4582.72,4063.28 ; IIC.1@4599,4023.97 cw(c4599,3968.38) 4638.31,4007.69 cw(c4677.62,4047) IIC.1@4622.03,4047 ; 3.3V.2@4752.72,3612.28 ccw(c4713.41,3651.59) 4769,3651.59 ccw(c4824.59,3651.59) 3.3V.2@4785.28,3612.28 ; 3.3V.2@4769,3596 4769,3877 IIC.1@4599,4047 4255.51,4047 ; 4134,4016 4031,4016 3995.4,4051.6 4.7K.2@3854,4051.6 3691.6,4051.6 3476.72,3836.72 3434.72,3836.72 3218,3620 104_A.1@3218,3615.53 104_B.1@3356.17,3615.53 3413.94,3615.53 3421,3614 3439.47,3610 3479.17,3614 104_C.1@3494.33,3615.53 104_D.1@3632.5,3615.53 104_E.1@3770.67,3615.53 104_F.1@3908.83,3615.53 104_G.1@4047,3615.53 4094.06,3614 4221.6,3614 ; 4215,3607.4 4221.6,3614
  Bottom Layer w15: 104_A.1@3219.53,3614 3421,3614 3479.17,3614 4094.06,3614 ; 104_A.1@3230.37,3603.15 cw(c3256.56,3576.97) 3256.56,3614 ; 104_A.1@3230.37,3627.9 ccw(c3263.94,3661.47) 3263.94,3614 ; 3310.23,3614 ccw(c3310.23,3661.47) 104_B.1@3343.79,3627.9 ; 3317.61,3614 cw(c3317.61,3576.97) 104_B.1@3343.79,3603.15 ; 104_B.1@3368.54,3603.15 cw(c3394.73,3576.97) 3394.73,3614 ; 104_B.1@3368.54,3627.9 ccw(c3402.1,3661.47) 3402.1,3614 ; 3448.4,3614 ccw(c3448.4,3661.47) 104_C.1@3481.96,3627.9 ; 3455.77,3614 cw(c3455.77,3576.97) 104_C.1@3481.96,3603.15 ; 104_C.1@3506.71,3603.15 cw(c3532.89,3576.97) 3532.89,3614 ; 104_C.1@3506.71,3627.9 ccw(c3540.27,3661.47) 3540.27,3614 ; 3586.56,3614 ccw(c3586.56,3661.47) 104_D.1@3620.13,3627.9 ; 3593.94,3614 cw(c3593.94,3576.97) 104_D.1@3620.13,3603.15 ; 104_D.1@3644.87,3603.15 cw(c3671.06,3576.97) 3671.06,3614 ; 104_D.1@3644.87,3627.9 ccw(c3678.44,3661.47) 3678.44,3614 ; 3724.73,3614 ccw(c3724.73,3661.47) 104_E.1@3758.29,3627.9 ; 3732.11,3614 cw(c3732.11,3576.97) 104_E.1@3758.29,3603.15 ; 104_E.1@3783.04,3603.15 cw(c3809.23,3576.97) 3809.23,3614 ; 104_E.1@3783.04,3627.9 ccw(c3816.6,3661.47) 3816.6,3614 ; 3862.9,3614 ccw(c3862.9,3661.47) 104_F.1@3896.46,3627.9 ; 3870.27,3614 cw(c3870.27,3576.97) 104_F.1@3896.46,3603.15 ; 104_F.1@3921.21,3603.15 cw(c3947.39,3576.97) 3947.39,3614 ; 104_F.1@3921.21,3627.9 ccw(c3954.77,3661.47) 3954.77,3614 ; 4001.06,3614 ccw(c4001.06,3661.47) 104_G.1@4034.63,3627.9 ; 4008.44,3614 cw(c4008.44,3576.97) 104_G.1@4034.63,3603.15 ; 104_G.1@4059.37,3603.15 cw(c4085.56,3576.97) 4085.56,3614 ; 104_G.1@4059.37,3627.9 ccw(c4092.94,3661.47) 4092.94,3614 ; 104-.1@4082,4087 104-.1@4086,4091 ; IIC.1@4599,4047 IIC.1@4609,4047
A: 10k_1_.1 4017_DIR.1 CD4053.9 CD4053.10 CD4053.11 | length 1355.2
  Bottom Layer w13: 10k_1_.1@1140,3821 1258,3821 1303,3866 CD4053.10@1303,3978.73 ; 10k_1_.1@1154.55,3811.45 cw(c1177.59,3788.41) 1177.59,3821 cw(c1177.59,3853.59) 10k_1_.1@1154.55,3830.55 ; 4017_DIR.1@1177.97,4580 cw(c1122.38,4580) 1161.69,4540.69 cw(c1201,4501.38) 4017_DIR.1@1201,4556.97 ; 4017_DIR.1@1201,4580 1106,4485 1106,4193 1253,4046 CD4053.9@1253,3978.73 CD4053.10@1303,3978.73 ; CD4053.9@1249.24,4013.98 ccw(c1240.18,4023.05) 1253,4023.05 ccw(c1265.82,4023.05) CD4053.9@1256.76,4013.98 ; CD4053.9@1256.76,3974.98 cw(c1265.82,3965.91) 1265.82,3978.73 cw(c1265.82,3991.55) CD4053.9@1256.76,3982.49 ; CD4053.10@1299.24,3943.48 cw(c1290.18,3934.41) 1303,3934.41 cw(c1315.82,3934.41) CD4053.10@1306.76,3943.48 ; CD4053.10@1299.24,3974.98 ccw(c1290.18,3965.91) 1290.18,3978.73 ccw(c1290.18,3991.55) CD4053.10@1299.24,3982.49 ; CD4053.10@1306.76,3974.98 cw(c1315.82,3965.91) 1315.82,3978.73 cw(c1315.82,3991.55) CD4053.10@1306.76,3982.49 ; CD4053.11@1349.24,3974.98 ccw(c1340.18,3965.91) 1340.18,3978.73 ccw(c1340.18,3991.55) CD4053.11@1349.24,3982.49 ; CD4053.11@1353,3978.73 CD4053.10@1303,3978.73
AB: 470,.1 "AB BB CB.1" | length 563.1
  Bottom Layer w20: 2866.07,2404.63 cw(c2858.55,2390) 2875,2390 ; 2875,2422 2875,2390 ; 2883.93,2404.63 ccw(c2891.45,2390) 2875,2390 ; 3091.41,2049.48 3124,2082.07 3124,2141 2875,2390 ; 3091.41,2059.48 ccw(c3091.41,2083.62) 3108.48,2066.55 ccw(c3125.55,2049.48) 3101.41,2049.48
AD-DRV: 5k_adj.2 5k_adj.3 AD_DRV.1 LM358.1 | length 1281.5
  Top Layer w13: 5k_adj.3@3819.69,3271.24 3941,3392.55 3941,3657 4028,3657 ; 5k_adj.3@3819.69,3296.24 ccw(c3819.69,3356.59) 3862.36,3313.91 ccw(c3905.03,3271.24) 5k_adj.3@3844.69,3271.24 ; 4045.78,3639.22 ccw(c4057.48,3650.91) LM358.1@4060.26,3634.61 ; LM358.1@4055.11,3638.11 ccw(c4045.72,3628.72) 4045.72,3642 ccw(c4045.72,3655.28) LM358.1@4055.11,3645.89 ; LM358.1@4058.08,3647.42 cw(c4052.3,3681.3) 4028,3657 ; AD_DRV.1@4080.68,3758.68 cw(c4058.17,3736.17) 4090,3736.17 cw(c4121.83,3736.17) AD_DRV.1@4099.32,3758.68 ; LM358.1@4083.11,3645.89 ccw(c4073.72,3655.28) 4087,3655.28 ccw(c4100.28,3655.28) LM358.1@4090.89,3645.89 ; AD_DRV.1@4090,3768 4090,3706 4087,3703 LM358.1@4087,3642 4043,3642 4028,3657
  Bottom Layer w13: 5k_adj.2@3678.27,3271.24 5k_adj.3@3819.69,3271.24 ; 5k_adj.2@3695.94,3253.57 cw(c3738.61,3210.9) 3738.61,3271.24 cw(c3738.61,3331.59) 5k_adj.2@3695.94,3288.92 ; 5k_adj.3@3802.02,3253.57 ccw(c3759.34,3210.9) 3759.34,3271.24 ccw(c3759.34,3331.59) 5k_adj.3@3802.02,3288.92
AT: 1.1K.2 1K,.1 "AT BT CT.1" | length 300.7
  Bottom Layer w20: 2257.93,2201.07 ccw(c2240.86,2218.14) 2265,2218.14 ccw(c2289.14,2218.14) 2272.07,2201.07 ; 2265,2194 2265,2338 2349,2422
BB: 470,,.1 "AB BB CB.2" | length 329
  Top Layer w20: 2975,2422 3028,2369 v1(3028,2115)
BREAK: MS33035.23 SELECT.1 | length 911.9
  Top Layer w20: v1(2550,2043) 2550,2074 2591,2115 MS33035.23@2691,2115 ; v1(2787,1767) 3001,1553 SELECT.1@3001,1506.85
  Bottom Layer w20: v1(2550,2043) 2745.51,1847.49 2745.51,1825.49 2787,1784 v1(2787,1767)
BT: 1.1K,.2 1K,,.1 "AT BT CT.2" | length 330
  Bottom Layer w20: 2429.93,2230.93 cw(c2408.03,2209.03) 2439,2209.03 ; 2431.93,2167.07 ccw(c2414.86,2184.14) 2439,2184.14 ccw(c2463.14,2184.14) 2446.07,2167.07 ; 2439,2160 2439,2241 2437,2243 2449,2255 2449,2422
CB: 470,,,.1 "AB BB CB.3" | length 285.1
  Top Layer w20: v1(2954,2187) 2954,2301 v1(2991,2338)
  Bottom Layer w20: v1(2991,2338) 3075,2422
CLOCK: CD4017.14 PWM_TO_4017.1 | length 507.9
  Top Layer w13: PWM_TO_4017.1@1201,4741.97 cw(c1201,4686.38) 1240.31,4725.69 cw(c1279.62,4765) PWM_TO_4017.1@1224.03,4765 ; PWM_TO_4017.1@1201,4765 1247,4719 1247,4491 1257,4481 CD4017.14@1257,4387.73 ; CD4017.14@1253.24,4422.98 ccw(c1244.18,4432.05) 1257,4432.05 ccw(c1269.82,4432.05) CD4017.14@1260.76,4422.98
COM: 3_OR_4.2 DRV11873.13 Motor.1 | length 2645.4
  Top Layer w13: 3_OR_4.2@2175.8,3312.12 ccw(c2172.43,3320) 2181,3320 ; 3_OR_4.2@2181,3300 2181,3320 ; 3_OR_4.2@2181.18,3300.06 cw(c2205.91,3308.12) 2187.51,3326.51 ; 3_OR_4.2@2186.2,3312.12 cw(c2189.57,3320) 2181,3320 ; 3_OR_4.2@2193.54,3304.09 cw(c2228.51,3315.49) 2202.5,3341.5 ; DRV11873.13@2787.86,3752.41 2735.16,3752.41 2724.36,3763.2 2689.79,3763.2 2639.09,3712.5 2639.09,3321 2589.4,3271.32 2439.68,3271.32 2369.5,3341.5 2202.5,3341.5 ; 2181,3320 2202.5,3341.5
  Bottom Layer w13: 3_OR_4.2@2175.8,3312.12 ccw(c2172.43,3320) 2181,3320 ; 3_OR_4.2@2181,3300 2181,3320 ; 3_OR_4.2@2181.18,3300.06 cw(c2205.91,3308.12) 2187.51,3326.51 ; 3_OR_4.2@2186.2,3312.12 cw(c2189.57,3320) 2181,3320 ; 3_OR_4.2@2193.54,3304.09 cw(c2228.51,3315.49) 2202.5,3341.5 ; Motor.1@3080.32,3360 ccw(c2972.45,3360) 3048.72,3436.28 ccw(c3125,3512.55) Motor.1@3125,3404.68 ; Motor.1@3093.32,3360 ccw(c3016.83,3360) 3070.92,3414.08 ccw(c3125,3468.17) Motor.1@3125,3391.68 ; Motor.1@3125,3360 3010.72,3474.28 2431.28,3474.28 2298.5,3341.5 2202.5,3341.5 ; 2181,3320 2202.5,3341.5
COM_TO: 1K_3_.1 1K_4_.1 1K_5_.1 3_OR_4.3 | length 630.8
  Top Layer w13: 3_OR_4.3@2121.68,3309.32 ccw(c2099.17,3331.83) 2131,3331.83 ccw(c2162.83,3331.83) 3_OR_4.3@2140.32,3309.32 ; 1K_3_.1@2123.45,3433.45 cw(c2100.41,3410.41) 2133,3410.41 cw(c2165.59,3410.41) 1K_3_.1@2142.55,3433.45 ; 1K_3_.1@2123.45,3462.55 ccw(c2100.41,3485.59) 2133,3485.59 ccw(c2165.59,3485.59) 1K_3_.1@2142.55,3462.55 ; 1K_4_.1@2123.45,3521.45 cw(c2100.41,3498.41) 2133,3498.41 cw(c2165.59,3498.41) 1K_4_.1@2142.55,3521.45 ; 1K_4_.1@2123.45,3550.55 ccw(c2100.41,3573.59) 2133,3573.59 ccw(c2165.59,3573.59) 1K_4_.1@2142.55,3550.55 ; 1K_5_.1@2123.45,3609.45 cw(c2100.41,3586.41) 2133,3586.41 cw(c2165.59,3586.41) 1K_5_.1@2142.55,3609.45 ; 3_OR_4.3@2131,3300 2131,3373 2133,3375 1K_3_.1@2133,3448 1K_4_.1@2133,3536 1K_5_.1@2133,3624
CP: CD4018.14 PWM_TO_4018.1 | length 2502.9
  Bottom Layer w13: CD4018.14@1357,3500 1402.5,3545.5 1483.5,3545.5 1509,3520 1509,3480 1589,3400 1976,3400 2292.5,3083.5 2292.5,3040 2310,3022.5 2667.5,3022.5 2685,3040 3313,3040 PWM_TO_4018.1@3370,2983 ; CD4018.14@1357,3523.03 ccw(c1357,3578.62) 1396.31,3539.31 ccw(c1435.62,3500) CD4018.14@1380.03,3500 ; PWM_TO_4018.1@3346.97,2983 ccw(c3291.38,2983) 3330.69,3022.31 ccw(c3370,3061.62) PWM_TO_4018.1@3370,3006.03
CPN: 104_1.1 DRV11873.6 | length 315.6
  Top Layer w13: v1(2480,3695) 2487.02,3702.02 DRV11873.6@2554,3702.02 ; v1@2480.71,3694.29 cw(c2499.35,3675.65) 2499.35,3702.02
  Bottom Layer w13: 104_1.1@2353,3660 104_1.1@2365,3660
  Bottom Layer w15: 104_1.1@2353.52,3667.45 ccw(c2359.61,3696.27) 2380.44,3675.44 ; 104_1.1@2356.62,3682.12 ccw(c2366.43,3728.56) 2400,3695 ; 104_1.1@2365,3660 2400,3695 ; v1(2480,3695) 2400,3695
CPP: 104_1.2 DRV11873.5 | length 497.7
  Top Layer w13: v1(2471,3750) 2493.79,3727.21 DRV11873.5@2554,3727.21
  Bottom Layer w13: 104_1.2@2353,3750 v1(2471,3750) ; 104_1.2@2366.08,3736.92 cw(c2397.66,3705.34) 2397.66,3750 cw(c2397.66,3794.66) 104_1.2@2366.08,3763.08
  Bottom Layer w15: 104_1.2@2353,3750 2361,3742 2479,3742 ; 104_1.2@2365.37,3732.63 cw(c2388.01,3709.99) 2388.01,3742 ; 104_1.2@2365.37,3757.37 ccw(c2402.49,3794.49) 2402.49,3742 ; 2451.69,3742 ccw(c2451.69,3769.31) v1(2471,3750)
CS: 3.3K.2 DRV11873.14 | length 206.9
  Top Layer w13: DRV11873.14@2787.86,3777.61 2846.03,3777.61 2857,3788.58 v1(2857,3816)
  Bottom Layer w13: 3.3K.2@2828.58,3793.67 ccw(c2806.83,3816) 2838,3816 ; 3.3K.2@2838,3779 2838,3816 ; 3.3K.2@2847.42,3793.67 cw(c2869.17,3816) 2838,3816 ; v1(2857,3816) 2838,3816
CT: 1.1K,,.2 1K,,,.1 "AT BT CT.3" | length 347.6
  Bottom Layer w20: 2549,2422 2549,2337 2643,2243 2652,2252 2731,2252 ; 2718.93,2244.93 ccw(c2701.86,2227.86) 2701.86,2252 ccw(c2701.86,2276.14) 2718.93,2259.07
"CUR SEN": 33.2 100.2 104,,.1 MS33035.9 | length 1330.2
  Top Layer w20: MS33035.9@2311,1765 v1(2391,1765) ; v1(2858,1953) 2860,1953 2941,1872 2965.89,1847.11 33.2@3100,1847.11 100.2@3100,1949 ; 33.2@3087.93,1840.03 ccw(c3070.86,1822.96) 3070.86,1847.11 ccw(c3070.86,1871.25) 33.2@3087.93,1854.18 ; 33.2@3092.93,1854.18 ccw(c3075.86,1871.25) 3100,1871.25 ccw(c3124.14,1871.25) 33.2@3107.07,1854.18 ; 100.2@3092.93,1941.93 cw(c3075.86,1924.86) 3100,1924.86 cw(c3124.14,1924.86) 100.2@3107.07,1941.93
  Bottom Layer w20: v1(2391,1765) 2391,1939 2528,2076 2582,2076 2705,1953 v1(2858,1953)
DIG_VCC: 10k_0.2 10k_1_.2 10k_2_.2 10k_3_.1 4018_ON_CLEAR.3 CD4001.14 CD4013.5 CD4013.9 CD4013.14 CD4013_.5 CD4013_.14 CD4017.16 CD4018.16 CD4053.16 CD4070.14 DIG_220UF.2 DIG_POWER.2 | length 9751.4
  Top Layer w13: CD4070.14@1112.67,3075.92 ccw(c1091.1,3082.27) 1107,3098.17 ; CD4070.14@1129.25,3092.5 cw(c1122.9,3114.07) 1107,3098.17 ; v1@1129.77,4408.36 cw(c1141.18,4398.91) CD4017.16@1146.16,4412.87 ; v1@1129.83,4423.55 ccw(c1157,4441.63) CD4017.16@1157,4409 ; CD4070.14@1136.17,3069 1107,3098.17 ; CD4013_.14@1143.24,3890.11 cw(c1134.18,3881.04) 1147,3881.04 cw(c1159.82,3881.04) CD4013_.14@1150.76,3890.11 ; CD4013_.14@1143.24,3960.61 ccw(c1134.18,3969.68) 1147,3969.68 ccw(c1159.82,3969.68) CD4013_.14@1150.76,3960.61 ; 1147,3846 CD4013_.14@1147,3925.36 1147,4003 1125,4025 1125,4255.65 1157,4287.65 CD4017.16@1157,4387.73 CD4017.16@1157,4409 ; CD4017.16@1152.49,4422.04 cw(c1129,4436.68) v1(1129,4409) CD4017.16@1157,4409 ; CD4017.16@1153.24,4352.48 cw(c1144.18,4343.41) 1157,4343.41 cw(c1169.82,4343.41) CD4017.16@1160.76,4352.48 ; CD4018.16@1157,3476.97 ccw(c1157,3421.38) 1117.69,3460.69 ccw(c1078.38,3500) 1133.97,3500 ccw(c1078.38,3500) 1117.69,3539.31 ccw(c1157,3578.62) 1157,3523.03 ccw(c1157,3578.62) 1196.31,3539.31 ccw(c1235.62,3500) CD4018.16@1180.03,3500 ; v1(1172,3869) 1097,3794 1097,3560 CD4018.16@1157,3500 ; CD4013_.5@1343.24,3685.39 cw(c1334.18,3676.32) 1347,3676.32 cw(c1359.82,3676.32) CD4013_.5@1350.76,3685.39 ; CD4013_.5@1343.24,3755.89 ccw(c1334.18,3764.96) 1347,3764.96 ccw(c1359.82,3764.96) CD4013_.5@1350.76,3755.89 ; v1(1347,3782) CD4013_.5@1347,3720.64 1347,3601.99 1299,3553.99 1210.99,3553.99 CD4018.16@1157,3500 ; CD4001.14@2039,3069 2207,3237 2825,3237 3018,3044 ; CD4001.14@2039,3093.5 ccw(c2039,3152.65) 2080.82,3110.82 ccw(c2122.65,3069) CD4001.14@2063.5,3069 ; v1(2777,2834) 2777,3000 2821,3044 3018,3044 ; 4018_ON_CLEAR.3@3045.82,3003 ccw(c3013.98,3003) 3036.49,3025.51 ccw(c3059,3048.02) 4018_ON_CLEAR.3@3059,3016.18 ; 4018_ON_CLEAR.3@3059,3003 3018,3044 ; 1107,3098.17 1107,3450 CD4018.16@1157,3500
  Bottom Layer w13: v1@1129.78,4408.38 cw(c1160,4384.47) 10k_0.2@1160,4423 ; CD4070.14@1136.17,3044.5 cw(c1136.17,2985.35) 1178,3027.18 cw(c1219.82,3069) CD4070.14@1160.67,3069 ; 10k_1_.2@1140,3906 1172,3906 ; 10k_0.2@1143.66,4423 ccw(c1143.66,4438.96) 10k_0.2@1159.5,4437.06 ; 10k_0.2@1146.6,4438.61 cw(c1129,4440.72) v1(1129,4423) ; 10k_0.2@1150.45,4427.45 cw(c1127.41,4404.41) 1160,4404.41 cw(c1192.59,4404.41) 10k_0.2@1169.55,4427.45 ; 10k_1_.2@1155.8,3897.9 cw(c1172,3885.75) 1172,3906 ; 10k_1_.2@1155.8,3914.1 ccw(c1172,3926.25) 1172,3906 ; 10k_0.2@1160,4442 10k_0.2@1160,4423 ; 10k_0.2@1160.36,4436.65 ccw(c1173.89,4423.65) 1160.62,4410.38 ; 10k_0.2@1169.73,4427.65 ccw(c1183.46,4414.46) 1170,4401 ; v1(1172,3869) 1172,3906 ; 1333.01,4279.01 ccw(c1295.15,4316.87) CD4013.9@1348.69,4316.87 ; v1(1347,3782) 1505,3782 1603,3880 CD4053.16@1603,3978.73 ; CD4013.9@1350.24,4313.11 cw(c1341.18,4304.04) 1354,4304.04 cw(c1366.82,4304.04) CD4013.9@1357.76,4313.11 ; CD4013.9@1354,4348.36 1354,4300 1325.55,4271.55 1216.45,4271.55 1160,4328 1160,4411 ; 1355.2,4301.2 ccw(c1339.53,4316.87) CD4013.9@1361.69,4316.87 ; CD4013.5@1400.24,4178.89 ccw(c1391.18,4187.96) 1404,4187.96 ccw(c1416.82,4187.96) CD4013.5@1407.76,4178.89 ; CD4013.5@1404,4143.64 1404,4195 1374,4225 1234,4225 1220,4211 1134,4211 1129,4216 v1(1129,4409) v1(1129,4423) ; 10k_2_.2@1429.45,2866.45 ccw(c1406.41,2843.41) 1406.41,2876 ccw(c1406.41,2908.59) 10k_2_.2@1429.45,2885.55 ; 10k_2_.2@1439,2876 1329.17,2876 CD4070.14@1136.17,3069 1111,3094.17 1111,3240 1143,3272 1880,3272 2039,3113 ; CD4053.16@1599.24,3943.48 cw(c1590.18,3934.41) 1603,3934.41 cw(c1615.82,3934.41) CD4053.16@1606.76,3943.48 ; CD4013.14@1600.24,4383.61 ccw(c1591.18,4392.68) 1604,4392.68 ccw(c1616.82,4392.68) CD4013.14@1607.76,4383.61 ; CD4013.14@1604,4348.36 1604,4400 ; CD4001.14@2026.1,3089.83 ccw(c2011.74,3113) 2039,3113 ; CD4001.14@2039,3069 2039,3113 ; CD4001.14@2051.9,3089.83 cw(c2066.26,3113) 2039,3113 ; DIG_220UF.2@2141.38,4601.88 cw(c2101.27,4561.77) 2158,4561.77 cw(c2214.73,4561.77) DIG_220UF.2@2174.62,4601.88 ; DIG_220UF.2@2141.38,4750.12 ccw(c2101.27,4790.23) 2158,4790.23 ccw(c2214.73,4790.23) DIG_220UF.2@2174.62,4750.12 ; DIG_POWER.2@2150.68,4801.68 cw(c2133,4784) 2158,4784 ; 2158,4774.34 cw(c2196.66,4774.34) DIG_POWER.2@2169.32,4801.68 ; DIG_POWER.2@2160,4811 2158,4809 DIG_220UF.2@2158,4676 2158,4560 2114,4516 1680,4516 1604,4440 1604,4400 ; 10k_3_.1@2614.05,2869.9 cw(c2596.42,2850) 2623,2850 ; 10k_3_.1@2623,2885 2623,2850 ; 10k_3_.1@2631.95,2869.9 ccw(c2649.58,2850) 2623,2850 ; v1(2777,2834) 2639,2834 2623,2850 ; v1(1129,4423) 10k_0.2@1160,4423 ; 1160,4411 cw(c1178.28,4411) 1167.77,4425.96 ccw(c1178.28,4411) 1160,4411 ; 1160,4411 ccw(c1141.72,4411) 1152.23,4425.96 cw(c1141.72,4411) 1160,4411 ; 1160,4411 10k_0.2@1160,4423 ; 1160,4411 1170,4401 ; 1170,4401 1281,4401 1320,4440 1564,4440 1604,4400
DIR: MS33035.3 SELECT.3 | length 870.2
  Top Layer w20: MS33035.3@2311,2065 2364,2065 2439,1990 v1(2545,1990)
  Bottom Layer w20: v1@2542.5,1990 ccw(c2558.19,1990) 2547.1,1978.9 ; v1(2545,1990) 2545,1981 2725,1801 2725,1610 2798,1537 v1(2798,1502)
EN: 4.7K,.2 MS33035.7 锁存.2 | length 1224.9
  Top Layer w20: MS33035.7@2311,1865 2429,1865 v1(2431,1863) ; v1(2677,1398) 3156,1398 锁存.2@3169,1411
  Bottom Layer w20: v1(2431,1863) 2493,1801 2561,1801 2624,1738 2624,1451 v1(2677,1398)
ENABLE: 4.7K,.1 SELECT.4 | length 509.2
  Bottom Layer w20: 2516,1863 2570,1863 2656,1777 2656,1545 v1(2701,1500) ; 2523.07,1855.93 cw(c2540.14,1838.86) 2540.14,1863 cw(c2540.14,1887.14) 2523.07,1870.07
FAULT_OUT: 5817_1,.2 Fault.2 MS33035.14 | length 687.4
  Top Layer w20: MS33035.14@2691,1665 2742,1665 v1(2798,1609)
  Bottom Layer w20: v1(2798,1609) 3008,1609 3083,1534 3100.6,1534 3100.6,1583.6 3123,1606 3203,1606 v1(3247,1650)
FG: 10K_1.2 DRV11873.2 F_out.1 | length 1110.7
  Top Layer w13: F_out.1@1967,3598 2009,3598 ; F_out.1@1986.68,3598.18 ccw(c1986.68,3652.5) 2025.09,3614.09 ; F_out.1@1986.68,3611.18 ccw(c1986.68,3696.89) 2047.29,3636.29 ; F_out.1@1998.23,3591.64 cw(c2009,3585.71) 2009,3598 ; F_out.1@1998.23,3604.36 ccw(c2009,3610.29) 2009,3598 ; v1(2586,3892) 2593.12,3842.88 2593.12,3802.8 DRV11873.2@2554,3802.8 2486.8,3802.8 2404,3720 2091,3720 2051,3680 2051,3640 2009,3598
  Bottom Layer w13: 10K_1.2@2512.92,3917.5 cw(c2493.77,3886.38) 2529.32,3894.84 ; 10K_1.2@2520,3934 2530,3892 v1(2586,3892) ; 2528.03,3900.28 cw(c2555.89,3906.92) 10K_1.2@2531.5,3921.92